# EAGLE board 555srvc-panel (EAGLE 7.2.0), part 1 of 2
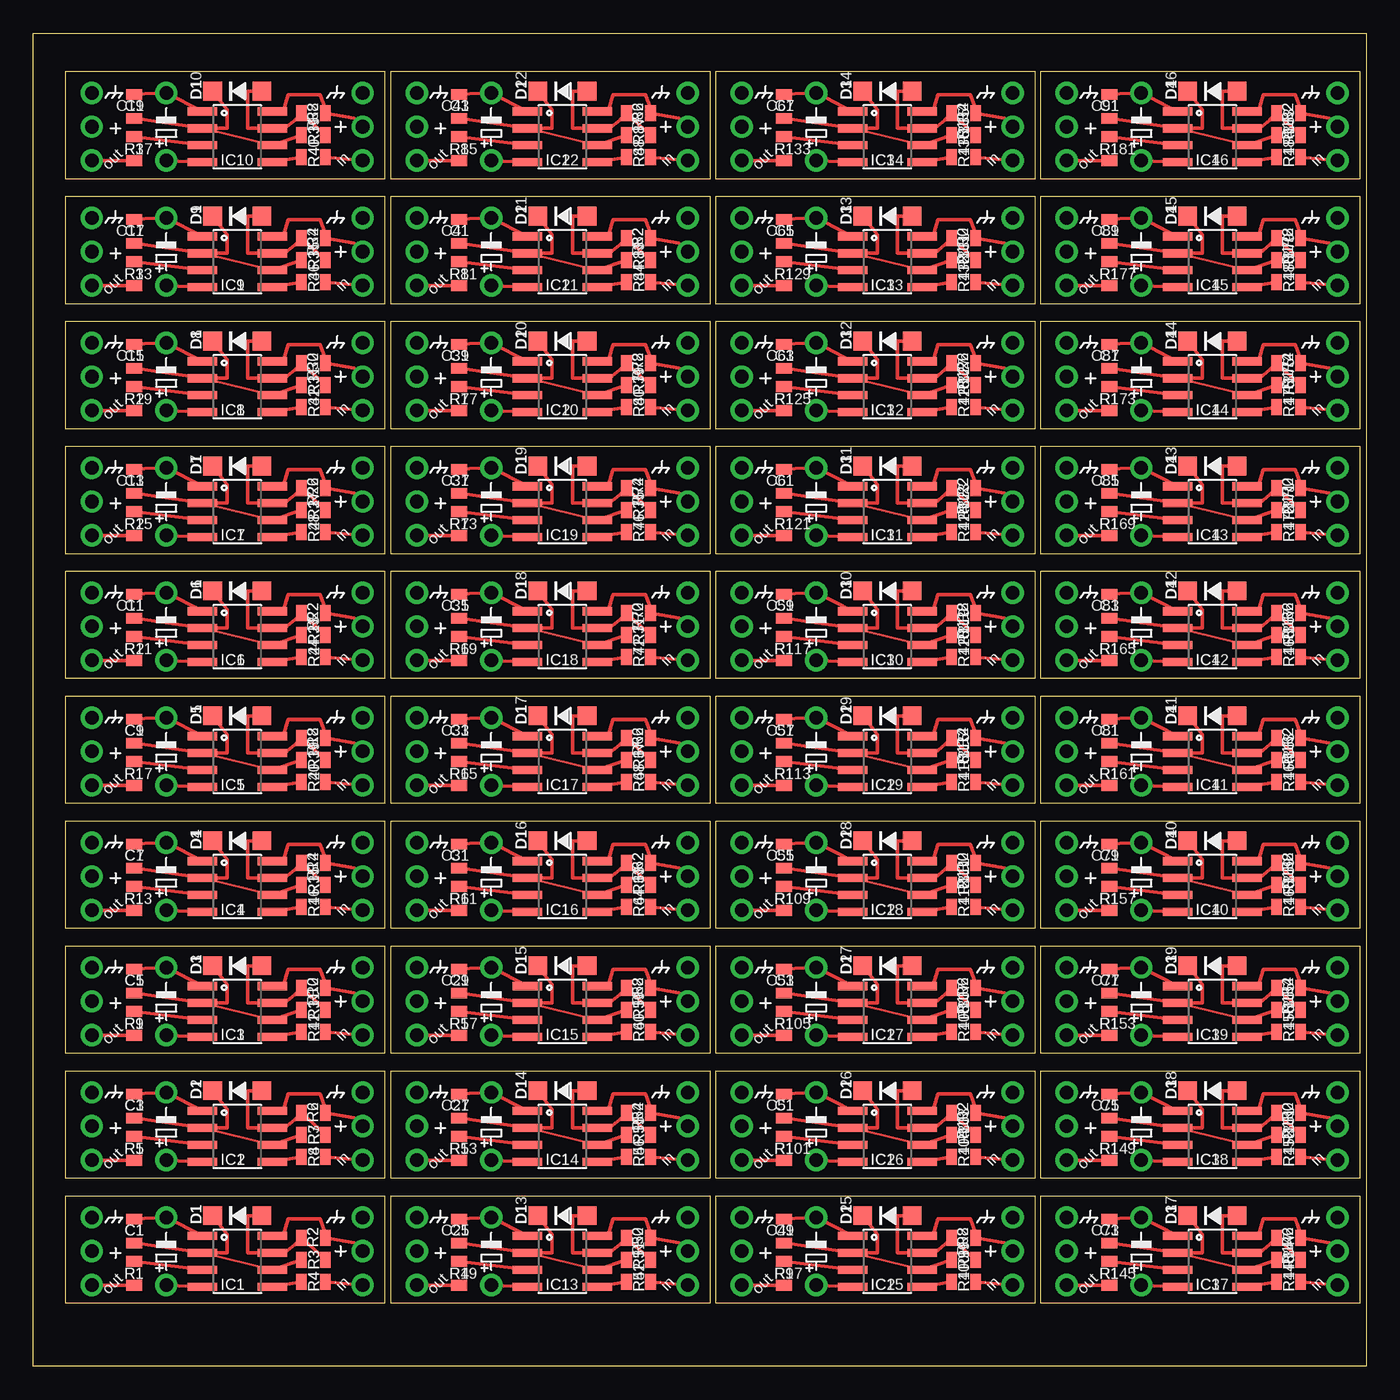
[diagram p0: board, top side]
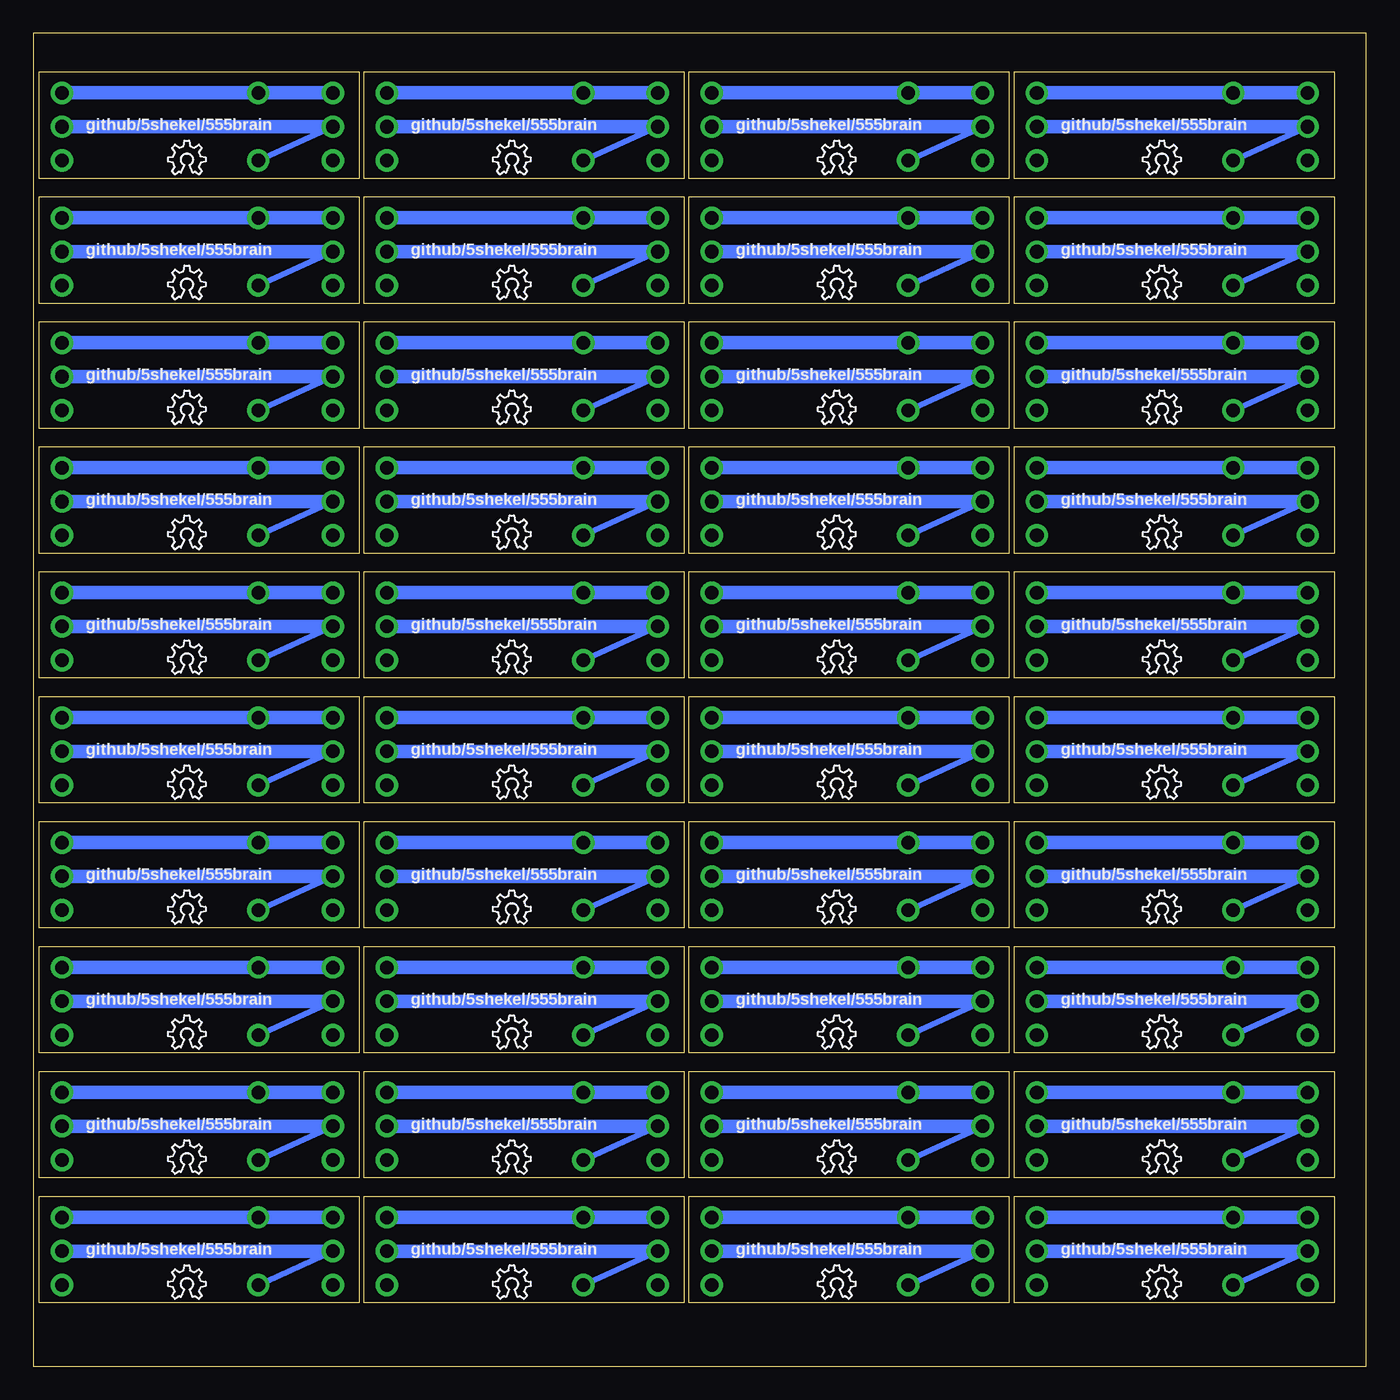
[diagram p1: board, bottom side, seen from below]

Size 100 x 100 mm. Coordinates in mm from the lower left corner, seen from the top.
Outline: 2.41,4.74 26.41,4.74 26.41,12.74 2.41,12.74 2.41,4.74
Outline: 2.41,14.12 26.41,14.12 26.41,22.12 2.41,22.12 2.41,14.12
Outline: 2.41,23.49 26.41,23.49 26.41,31.49 2.41,31.49 2.41,23.49
Outline: 2.41,32.87 26.41,32.87 26.41,40.87 2.41,40.87 2.41,32.87
Outline: 2.41,42.24 26.41,42.24 26.41,50.24 2.41,50.24 2.41,42.24
Outline: 2.41,51.61 26.41,51.61 26.41,59.61 2.41,59.61 2.41,51.61
Outline: 2.41,60.99 26.41,60.99 26.41,68.99 2.41,68.99 2.41,60.99
Outline: 2.41,70.36 26.41,70.36 26.41,78.36 2.41,78.36 2.41,70.36
Outline: 2.41,79.73 26.41,79.73 26.41,87.73 2.41,87.73 2.41,79.73
Outline: 2.41,89.11 26.41,89.11 26.41,97.11 2.41,97.11 2.41,89.11
Outline: 26.79,4.74 50.79,4.74 50.79,12.74 26.79,12.74 26.79,4.74
Outline: 26.79,14.12 50.79,14.12 50.79,22.12 26.79,22.12 26.79,14.12
Outline: 26.79,23.49 50.79,23.49 50.79,31.49 26.79,31.49 26.79,23.49
Outline: 26.79,32.87 50.79,32.87 50.79,40.87 26.79,40.87 26.79,32.87
Outline: 26.79,42.24 50.79,42.24 50.79,50.24 26.79,50.24 26.79,42.24
Outline: 26.79,51.61 50.79,51.61 50.79,59.61 26.79,59.61 26.79,51.61
Outline: 26.79,60.99 50.79,60.99 50.79,68.99 26.79,68.99 26.79,60.99
Outline: 26.79,70.36 50.79,70.36 50.79,78.36 26.79,78.36 26.79,70.36
Outline: 26.79,79.73 50.79,79.73 50.79,87.73 26.79,87.73 26.79,79.73
Outline: 26.79,89.11 50.79,89.11 50.79,97.11 26.79,97.11 26.79,89.11
Outline: 51.18,4.74 75.18,4.74 75.18,12.74 51.18,12.74 51.18,4.74
Outline: 51.18,14.12 75.18,14.12 75.18,22.12 51.18,22.12 51.18,14.12
Outline: 51.18,23.49 75.18,23.49 75.18,31.49 51.18,31.49 51.18,23.49
Outline: 51.18,32.87 75.18,32.87 75.18,40.87 51.18,40.87 51.18,32.87
Outline: 51.18,42.24 75.18,42.24 75.18,50.24 51.18,50.24 51.18,42.24
Outline: 51.18,51.61 75.18,51.61 75.18,59.61 51.18,59.61 51.18,51.61
Outline: 51.18,60.99 75.18,60.99 75.18,68.99 51.18,68.99 51.18,60.99
Outline: 51.18,70.36 75.18,70.36 75.18,78.36 51.18,78.36 51.18,70.36
Outline: 51.18,79.73 75.18,79.73 75.18,87.73 51.18,87.73 51.18,79.73
Outline: 51.18,89.11 75.18,89.11 75.18,97.11 51.18,97.11 51.18,89.11
Outline: 75.56,4.74 99.56,4.74 99.56,12.74 75.56,12.74 75.56,4.74
Outline: 75.56,14.12 99.56,14.12 99.56,22.12 75.56,22.12 75.56,14.12
Outline: 75.56,23.49 99.56,23.49 99.56,31.49 75.56,31.49 75.56,23.49
Outline: 75.56,32.87 99.56,32.87 99.56,40.87 75.56,40.87 75.56,32.87
Outline: 75.56,42.24 99.56,42.24 99.56,50.24 75.56,50.24 75.56,42.24
Outline: 75.56,51.61 99.56,51.61 99.56,59.61 75.56,59.61 75.56,51.61
Outline: 75.56,60.99 99.56,60.99 99.56,68.99 75.56,68.99 75.56,60.99
Outline: 75.56,70.36 99.56,70.36 99.56,78.36 75.56,78.36 75.56,70.36
Outline: 75.56,79.73 99.56,79.73 99.56,87.73 75.56,87.73 75.56,79.73
Outline: 75.56,89.11 99.56,89.11 99.56,97.11 75.56,97.11 75.56,89.11
Outline: 0,0 0,100 100,100 100,0 0,0
Copper layers (1*16): Top 0.035mm / dielectric 1.5mm / Bottom 0.035mm
Design rules "default": minimum track width 10mil, minimum drill 0.6mm, track to track 8mil, track to pad 8mil, pad to pad 8mil, via to via 8mil, smd to smd 8mil, copper to edge 40mil, drill to drill 8mil, minimum pad ring 10mil, minimum via ring 8mil, stop-mask expansion 4mil, vias tented up to drill 0mil, thermal gap 10mil

## Footprints (pad centres in the part's own frame; a part is rotated, then mirrored left to right if it is on the bottom)
0805 = smd 0.8 x 1.2: 1 -0.9,0; 2 0.9,0
E5-6 = drill 1.016 pad 1.677: + -2.54,0 | drill 1.016 pad 1.676: - 2.54,0
SOD-123 = smd 1.4 x 1.4: A 1.85,0; C -1.85,0
SO08 = smd 0.61 x 2.21: 1 -1.905,-2.616; 2 -0.635,-2.616; 3 0.635,-2.616; 4 1.905,-2.616; 5 1.905,2.616; 6 0.635,2.616; 7 -0.635,2.616; 8 -1.905,2.616
1X03-CLEANBIG = drill 1.016 pad 1.676: 1 -2.54,0; 2 0,0; 3 2.54,0

## Placement (x,y rotation side)
C1  1uF  [0805]  7.56,10.15 90 top
C2  [E5-6]  9.97,8.63 90 top
C3  1uF  [0805]  7.56,19.52 90 top
C4  [E5-6]  9.97,18 90 top
C5  1uF  [0805]  7.56,28.9 90 top
C6  [E5-6]  9.97,27.37 90 top
C7  1uF  [0805]  7.56,38.27 90 top
C8  [E5-6]  9.97,36.75 90 top
C9  1uF  [0805]  7.56,47.65 90 top
C10  [E5-6]  9.97,46.12 90 top
C11  1uF  [0805]  7.56,57.02 90 top
C12  [E5-6]  9.97,55.5 90 top
C13  1uF  [0805]  7.56,66.39 90 top
C14  [E5-6]  9.97,64.87 90 top
C15  1uF  [0805]  7.56,75.77 90 top
C16  [E5-6]  9.97,74.24 90 top
C17  1uF  [0805]  7.56,85.14 90 top
C18  [E5-6]  9.97,83.62 90 top
C19  1uF  [0805]  7.56,94.52 90 top
C20  [E5-6]  9.97,92.99 90 top
C25  1uF  [0805]  31.95,10.15 90 top
C26  [E5-6]  34.36,8.63 90 top
C27  1uF  [0805]  31.95,19.52 90 top
C28  [E5-6]  34.36,18 90 top
C29  1uF  [0805]  31.95,28.9 90 top
C30  [E5-6]  34.36,27.37 90 top
C31  1uF  [0805]  31.95,38.27 90 top
C32  [E5-6]  34.36,36.75 90 top
C33  1uF  [0805]  31.95,47.65 90 top
C34  [E5-6]  34.36,46.12 90 top
C35  1uF  [0805]  31.95,57.02 90 top
C36  [E5-6]  34.36,55.5 90 top
C37  1uF  [0805]  31.95,66.39 90 top
C38  [E5-6]  34.36,64.87 90 top
C39  1uF  [0805]  31.95,75.77 90 top
C40  [E5-6]  34.36,74.24 90 top
C41  1uF  [0805]  31.95,85.14 90 top
C42  [E5-6]  34.36,83.62 90 top
C43  1uF  [0805]  31.95,94.52 90 top
C44  [E5-6]  34.36,92.99 90 top
C49  1uF  [0805]  56.33,10.15 90 top
C50  [E5-6]  58.74,8.63 90 top
C51  1uF  [0805]  56.33,19.52 90 top
C52  [E5-6]  58.74,18 90 top
C53  1uF  [0805]  56.33,28.9 90 top
C54  [E5-6]  58.74,27.37 90 top
C55  1uF  [0805]  56.33,38.27 90 top
C56  [E5-6]  58.74,36.75 90 top
C57  1uF  [0805]  56.33,47.65 90 top
C58  [E5-6]  58.74,46.12 90 top
C59  1uF  [0805]  56.33,57.02 90 top
C60  [E5-6]  58.74,55.5 90 top
C61  1uF  [0805]  56.33,66.39 90 top
C62  [E5-6]  58.74,64.87 90 top
C63  1uF  [0805]  56.33,75.77 90 top
C64  [E5-6]  58.74,74.24 90 top
C65  1uF  [0805]  56.33,85.14 90 top
C66  [E5-6]  58.74,83.62 90 top
C67  1uF  [0805]  56.33,94.52 90 top
C68  [E5-6]  58.74,92.99 90 top
C73  1uF  [0805]  80.71,10.15 90 top
C74  [E5-6]  83.13,8.63 90 top
C75  1uF  [0805]  80.71,19.52 90 top
C76  [E5-6]  83.13,18 90 top
C77  1uF  [0805]  80.71,28.9 90 top
C78  [E5-6]  83.13,27.37 90 top
C79  1uF  [0805]  80.71,38.27 90 top
C80  [E5-6]  83.13,36.75 90 top
C81  1uF  [0805]  80.71,47.65 90 top
C82  [E5-6]  83.13,46.12 90 top
C83  1uF  [0805]  80.71,57.02 90 top
C84  [E5-6]  83.13,55.5 90 top
C85  1uF  [0805]  80.71,66.39 90 top
C86  [E5-6]  83.13,64.87 90 top
C87  1uF  [0805]  80.71,75.77 90 top
C88  [E5-6]  83.13,74.24 90 top
C89  1uF  [0805]  80.71,85.14 90 top
C90  [E5-6]  83.13,83.62 90 top
C91  1uF  [0805]  80.71,94.52 90 top
C92  [E5-6]  83.13,92.99 90 top
D1  [SOD-123]  15.31,11.29 0 top
D2  [SOD-123]  15.31,20.67 0 top
D3  [SOD-123]  15.31,30.04 0 top
D4  [SOD-123]  15.31,39.41 0 top
D5  [SOD-123]  15.31,48.79 0 top
D6  [SOD-123]  15.31,58.16 0 top
D7  [SOD-123]  15.31,67.54 0 top
D8  [SOD-123]  15.31,76.91 0 top
D9  [SOD-123]  15.31,86.28 0 top
D10  [SOD-123]  15.31,95.66 0 top
D13  [SOD-123]  39.69,11.29 0 top
D14  [SOD-123]  39.69,20.67 0 top
D15  [SOD-123]  39.69,30.04 0 top
D16  [SOD-123]  39.69,39.41 0 top
D17  [SOD-123]  39.69,48.79 0 top
D18  [SOD-123]  39.69,58.16 0 top
D19  [SOD-123]  39.69,67.54 0 top
D20  [SOD-123]  39.69,76.91 0 top
D21  [SOD-123]  39.69,86.28 0 top
D22  [SOD-123]  39.69,95.66 0 top
D25  [SOD-123]  64.08,11.29 0 top
D26  [SOD-123]  64.08,20.67 0 top
D27  [SOD-123]  64.08,30.04 0 top
D28  [SOD-123]  64.08,39.41 0 top
D29  [SOD-123]  64.08,48.79 0 top
D30  [SOD-123]  64.08,58.16 0 top
D31  [SOD-123]  64.08,67.54 0 top
D32  [SOD-123]  64.08,76.91 0 top
D33  [SOD-123]  64.08,86.28 0 top
D34  [SOD-123]  64.08,95.66 0 top
D37  [SOD-123]  88.46,11.29 0 top
D38  [SOD-123]  88.46,20.67 0 top
D39  [SOD-123]  88.46,30.04 0 top
D40  [SOD-123]  88.46,39.41 0 top
D41  [SOD-123]  88.46,48.79 0 top
D42  [SOD-123]  88.46,58.16 0 top
D43  [SOD-123]  88.46,67.54 0 top
D44  [SOD-123]  88.46,76.91 0 top
D45  [SOD-123]  88.46,86.28 0 top
D46  [SOD-123]  88.46,95.66 0 top
IC1  555  [SO08]  15.31,7.86 270 top
IC2  555  [SO08]  15.31,17.24 270 top
IC3  555  [SO08]  15.31,26.61 270 top
IC4  555  [SO08]  15.31,35.99 270 top
IC5  555  [SO08]  15.31,45.36 270 top
IC6  555  [SO08]  15.31,54.73 270 top
IC7  555  [SO08]  15.31,64.11 270 top
IC8  555  [SO08]  15.31,73.48 270 top
IC9  555  [SO08]  15.31,82.86 270 top
IC10  555  [SO08]  15.31,92.23 270 top
IC13  555  [SO08]  39.69,7.86 270 top
IC14  555  [SO08]  39.69,17.24 270 top
IC15  555  [SO08]  39.69,26.61 270 top
IC16  555  [SO08]  39.69,35.99 270 top
IC17  555  [SO08]  39.69,45.36 270 top
IC18  555  [SO08]  39.69,54.73 270 top
IC19  555  [SO08]  39.69,64.11 270 top
IC20  555  [SO08]  39.69,73.48 270 top
IC21  555  [SO08]  39.69,82.86 270 top
IC22  555  [SO08]  39.69,92.23 270 top
IC25  555  [SO08]  64.08,7.86 270 top
IC26  555  [SO08]  64.08,17.24 270 top
IC27  555  [SO08]  64.08,26.61 270 top
IC28  555  [SO08]  64.08,35.99 270 top
IC29  555  [SO08]  64.08,45.36 270 top
IC30  555  [SO08]  64.08,54.73 270 top
IC31  555  [SO08]  64.08,64.11 270 top
IC32  555  [SO08]  64.08,73.48 270 top
IC33  555  [SO08]  64.08,82.86 270 top
IC34  555  [SO08]  64.08,92.23 270 top
IC37  555  [SO08]  88.46,7.86 270 top
IC38  555  [SO08]  88.46,17.24 270 top
IC39  555  [SO08]  88.46,26.61 270 top
IC40  555  [SO08]  88.46,35.99 270 top
IC41  555  [SO08]  88.46,45.36 270 top
IC42  555  [SO08]  88.46,54.73 270 top
IC43  555  [SO08]  88.46,64.11 270 top
IC44  555  [SO08]  88.46,73.48 270 top
IC45  555  [SO08]  88.46,82.86 270 top
IC46  555  [SO08]  88.46,92.23 270 top
JP1  SERVO_OUT  [1X03-CLEANBIG]  4.39,18 270 top
JP2  SERVO_OUT  [1X03-CLEANBIG]  4.39,8.63 270 top
JP3  INPUT / CV  [1X03-CLEANBIG]  24.71,8.63 270 top
JP4  INPUT / CV  [1X03-CLEANBIG]  24.71,18 270 top
JP5  SERVO_OUT  [1X03-CLEANBIG]  4.39,27.37 270 top
JP6  INPUT / CV  [1X03-CLEANBIG]  24.71,27.37 270 top
JP7  SERVO_OUT  [1X03-CLEANBIG]  4.39,36.75 270 top
JP8  INPUT / CV  [1X03-CLEANBIG]  24.71,36.75 270 top
JP9  SERVO_OUT  [1X03-CLEANBIG]  4.39,46.12 270 top
JP10  INPUT / CV  [1X03-CLEANBIG]  24.71,46.12 270 top
JP11  SERVO_OUT  [1X03-CLEANBIG]  4.39,55.5 270 top
JP12  INPUT / CV  [1X03-CLEANBIG]  24.71,55.5 270 top
JP13  SERVO_OUT  [1X03-CLEANBIG]  4.39,64.87 270 top
JP14  INPUT / CV  [1X03-CLEANBIG]  24.71,64.87 270 top
JP15  SERVO_OUT  [1X03-CLEANBIG]  4.39,74.24 270 top
JP16  INPUT / CV  [1X03-CLEANBIG]  24.71,74.24 270 top
JP17  SERVO_OUT  [1X03-CLEANBIG]  4.39,83.62 270 top
JP18  INPUT / CV  [1X03-CLEANBIG]  24.71,83.62 270 top
JP19  SERVO_OUT  [1X03-CLEANBIG]  4.39,92.99 270 top
JP20  INPUT / CV  [1X03-CLEANBIG]  24.71,92.99 270 top
JP25  SERVO_OUT  [1X03-CLEANBIG]  28.77,8.63 270 top
JP26  INPUT / CV  [1X03-CLEANBIG]  49.09,8.63 270 top
JP27  SERVO_OUT  [1X03-CLEANBIG]  28.77,18 270 top
JP28  INPUT / CV  [1X03-CLEANBIG]  49.09,18 270 top
JP29  SERVO_OUT  [1X03-CLEANBIG]  28.77,27.37 270 top
JP30  INPUT / CV  [1X03-CLEANBIG]  49.09,27.37 270 top
JP31  SERVO_OUT  [1X03-CLEANBIG]  28.77,36.75 270 top
JP32  INPUT / CV  [1X03-CLEANBIG]  49.09,36.75 270 top
JP33  SERVO_OUT  [1X03-CLEANBIG]  28.77,46.12 270 top
JP34  INPUT / CV  [1X03-CLEANBIG]  49.09,46.12 270 top
JP35  SERVO_OUT  [1X03-CLEANBIG]  28.77,55.5 270 top
JP36  INPUT / CV  [1X03-CLEANBIG]  49.09,55.5 270 top
JP37  SERVO_OUT  [1X03-CLEANBIG]  28.77,64.87 270 top
JP38  INPUT / CV  [1X03-CLEANBIG]  49.09,64.87 270 top
JP39  SERVO_OUT  [1X03-CLEANBIG]  28.77,74.24 270 top
JP40  INPUT / CV  [1X03-CLEANBIG]  49.09,74.24 270 top
JP41  SERVO_OUT  [1X03-CLEANBIG]  28.77,83.62 270 top
JP42  INPUT / CV  [1X03-CLEANBIG]  49.09,83.62 270 top
JP43  SERVO_OUT  [1X03-CLEANBIG]  28.77,92.99 270 top
JP44  INPUT / CV  [1X03-CLEANBIG]  49.09,92.99 270 top
JP49  SERVO_OUT  [1X03-CLEANBIG]  53.15,8.63 270 top
JP50  INPUT / CV  [1X03-CLEANBIG]  73.47,8.63 270 top
JP51  SERVO_OUT  [1X03-CLEANBIG]  53.15,18 270 top
JP52  INPUT / CV  [1X03-CLEANBIG]  73.47,18 270 top
JP53  SERVO_OUT  [1X03-CLEANBIG]  53.15,27.37 270 top
JP54  INPUT / CV  [1X03-CLEANBIG]  73.47,27.37 270 top
JP55  SERVO_OUT  [1X03-CLEANBIG]  53.15,36.75 270 top
JP56  INPUT / CV  [1X03-CLEANBIG]  73.47,36.75 270 top
JP57  SERVO_OUT  [1X03-CLEANBIG]  53.15,46.12 270 top
JP58  INPUT / CV  [1X03-CLEANBIG]  73.47,46.12 270 top
JP59  SERVO_OUT  [1X03-CLEANBIG]  53.15,55.5 270 top
JP60  INPUT / CV  [1X03-CLEANBIG]  73.47,55.5 270 top
JP61  SERVO_OUT  [1X03-CLEANBIG]  53.15,64.87 270 top
JP62  INPUT / CV  [1X03-CLEANBIG]  73.47,64.87 270 top
JP63  SERVO_OUT  [1X03-CLEANBIG]  53.15,74.24 270 top
JP64  INPUT / CV  [1X03-CLEANBIG]  73.47,74.24 270 top
JP65  SERVO_OUT  [1X03-CLEANBIG]  53.15,83.62 270 top
JP66  INPUT / CV  [1X03-CLEANBIG]  73.47,83.62 270 top
JP67  SERVO_OUT  [1X03-CLEANBIG]  53.15,92.99 270 top
JP68  INPUT / CV  [1X03-CLEANBIG]  73.47,92.99 270 top
JP73  SERVO_OUT  [1X03-CLEANBIG]  77.54,8.63 270 top
JP74  INPUT / CV  [1X03-CLEANBIG]  97.86,8.63 270 top
JP75  SERVO_OUT  [1X03-CLEANBIG]  77.54,18 270 top
JP76  INPUT / CV  [1X03-CLEANBIG]  97.86,18 270 top
JP77  SERVO_OUT  [1X03-CLEANBIG]  77.54,27.37 270 top
JP78  INPUT / CV  [1X03-CLEANBIG]  97.86,27.37 270 top
JP79  SERVO_OUT  [1X03-CLEANBIG]  77.54,36.75 270 top
JP80  INPUT / CV  [1X03-CLEANBIG]  97.86,36.75 270 top
JP81  SERVO_OUT  [1X03-CLEANBIG]  77.54,46.12 270 top
JP82  INPUT / CV  [1X03-CLEANBIG]  97.86,46.12 270 top
JP83  SERVO_OUT  [1X03-CLEANBIG]  77.54,55.5 270 top
JP84  INPUT / CV  [1X03-CLEANBIG]  97.86,55.5 270 top
JP85  SERVO_OUT  [1X03-CLEANBIG]  77.54,64.87 270 top
JP86  INPUT / CV  [1X03-CLEANBIG]  97.86,64.87 270 top
JP87  SERVO_OUT  [1X03-CLEANBIG]  77.54,74.24 270 top
JP88  INPUT / CV  [1X03-CLEANBIG]  97.86,74.24 270 top
JP89  SERVO_OUT  [1X03-CLEANBIG]  77.54,83.62 270 top
JP90  INPUT / CV  [1X03-CLEANBIG]  97.86,83.62 270 top
JP91  SERVO_OUT  [1X03-CLEANBIG]  77.54,92.99 270 top
JP92  INPUT / CV  [1X03-CLEANBIG]  97.86,92.99 270 top
R1  2.2k  [0805]  7.56,6.97 270 top
R2  1.5k  [0805]  21.02,9.64 180 top
R3  47k  [0805]  21.02,7.99 0 top
R4  15k  [0805]  21.02,6.34 0 top
R5  2.2k  [0805]  7.56,16.35 270 top
R6  1.5k  [0805]  21.02,19.02 180 top
R7  47k  [0805]  21.02,17.36 0 top
R8  15k  [0805]  21.02,15.71 0 top
R9  2.2k  [0805]  7.56,25.72 270 top
R10  1.5k  [0805]  21.02,28.39 180 top
R11  47k  [0805]  21.02,26.74 0 top
R12  15k  [0805]  21.02,25.09 0 top
R13  2.2k  [0805]  7.56,35.1 270 top
R14  1.5k  [0805]  21.02,37.76 180 top
R15  47k  [0805]  21.02,36.11 0 top
R16  15k  [0805]  21.02,34.46 0 top
R17  2.2k  [0805]  7.56,44.47 270 top
R18  1.5k  [0805]  21.02,47.14 180 top
R19  47k  [0805]  21.02,45.49 0 top
R20  15k  [0805]  21.02,43.84 0 top
R21  2.2k  [0805]  7.56,53.84 270 top
R22  1.5k  [0805]  21.02,56.51 180 top
R23  47k  [0805]  21.02,54.86 0 top
R24  15k  [0805]  21.02,53.21 0 top
R25  2.2k  [0805]  7.56,63.22 270 top
R26  1.5k  [0805]  21.02,65.89 180 top
R27  47k  [0805]  21.02,64.23 0 top
R28  15k  [0805]  21.02,62.58 0 top
R29  2.2k  [0805]  7.56,72.59 270 top
R30  1.5k  [0805]  21.02,75.26 180 top
R31  47k  [0805]  21.02,73.61 0 top
R32  15k  [0805]  21.02,71.96 0 top
R33  2.2k  [0805]  7.56,81.97 270 top
R34  1.5k  [0805]  21.02,84.63 180 top
R35  47k  [0805]  21.02,82.98 0 top
R36  15k  [0805]  21.02,81.33 0 top
R37  2.2k  [0805]  7.56,91.34 270 top
R38  1.5k  [0805]  21.02,94.01 180 top
R39  47k  [0805]  21.02,92.36 0 top
R40  15k  [0805]  21.02,90.71 0 top
R49  2.2k  [0805]  31.95,6.97 270 top
R50  1.5k  [0805]  45.41,9.64 180 top
R51  47k  [0805]  45.41,7.99 0 top
R52  15k  [0805]  45.41,6.34 0 top
R53  2.2k  [0805]  31.95,16.35 270 top
R54  1.5k  [0805]  45.41,19.02 180 top
R55  47k  [0805]  45.41,17.36 0 top
R56  15k  [0805]  45.41,15.71 0 top
R57  2.2k  [0805]  31.95,25.72 270 top
R58  1.5k  [0805]  45.41,28.39 180 top
R59  47k  [0805]  45.41,26.74 0 top
R60  15k  [0805]  45.41,25.09 0 top
R61  2.2k  [0805]  31.95,35.1 270 top
R62  1.5k  [0805]  45.41,37.76 180 top
R63  47k  [0805]  45.41,36.11 0 top
R64  15k  [0805]  45.41,34.46 0 top
R65  2.2k  [0805]  31.95,44.47 270 top
R66  1.5k  [0805]  45.41,47.14 180 top
R67  47k  [0805]  45.41,45.49 0 top
R68  15k  [0805]  45.41,43.84 0 top
R69  2.2k  [0805]  31.95,53.84 270 top
R70  1.5k  [0805]  45.41,56.51 180 top
R71  47k  [0805]  45.41,54.86 0 top
R72  15k  [0805]  45.41,53.21 0 top
R73  2.2k  [0805]  31.95,63.22 270 top
R74  1.5k  [0805]  45.41,65.89 180 top
R75  47k  [0805]  45.41,64.23 0 top
R76  15k  [0805]  45.41,62.58 0 top
R77  2.2k  [0805]  31.95,72.59 270 top
R78  1.5k  [0805]  45.41,75.26 180 top
R79  47k  [0805]  45.41,73.61 0 top
R80  15k  [0805]  45.41,71.96 0 top
R81  2.2k  [0805]  31.95,81.97 270 top
R82  1.5k  [0805]  45.41,84.63 180 top
R83  47k  [0805]  45.41,82.98 0 top
R84  15k  [0805]  45.41,81.33 0 top
R85  2.2k  [0805]  31.95,91.34 270 top
R86  1.5k  [0805]  45.41,94.01 180 top
R87  47k  [0805]  45.41,92.36 0 top
R88  15k  [0805]  45.41,90.71 0 top
R97  2.2k  [0805]  56.33,6.97 270 top
R98  1.5k  [0805]  69.79,9.64 180 top
R99  47k  [0805]  69.79,7.99 0 top
R100  15k  [0805]  69.79,6.34 0 top
R101  2.2k  [0805]  56.33,16.35 270 top
R102  1.5k  [0805]  69.79,19.02 180 top
R103  47k  [0805]  69.79,17.36 0 top
R104  15k  [0805]  69.79,15.71 0 top
R105  2.2k  [0805]  56.33,25.72 270 top
R106  1.5k  [0805]  69.79,28.39 180 top
R107  47k  [0805]  69.79,26.74 0 top
R108  15k  [0805]  69.79,25.09 0 top
R109  2.2k  [0805]  56.33,35.1 270 top
R110  1.5k  [0805]  69.79,37.76 180 top
R111  47k  [0805]  69.79,36.11 0 top
R112  15k  [0805]  69.79,34.46 0 top
R113  2.2k  [0805]  56.33,44.47 270 top
R114  1.5k  [0805]  69.79,47.14 180 top
R115  47k  [0805]  69.79,45.49 0 top
R116  15k  [0805]  69.79,43.84 0 top
R117  2.2k  [0805]  56.33,53.84 270 top
R118  1.5k  [0805]  69.79,56.51 180 top
R119  47k  [0805]  69.79,54.86 0 top
R120  15k  [0805]  69.79,53.21 0 top
R121  2.2k  [0805]  56.33,63.22 270 top
R122  1.5k  [0805]  69.79,65.89 180 top
R123  47k  [0805]  69.79,64.23 0 top
R124  15k  [0805]  69.79,62.58 0 top
R125  2.2k  [0805]  56.33,72.59 270 top
R126  1.5k  [0805]  69.79,75.26 180 top
R127  47k  [0805]  69.79,73.61 0 top
R128  15k  [0805]  69.79,71.96 0 top
R129  2.2k  [0805]  56.33,81.97 270 top
R130  1.5k  [0805]  69.79,84.63 180 top
R131  47k  [0805]  69.79,82.98 0 top
R132  15k  [0805]  69.79,81.33 0 top
R133  2.2k  [0805]  56.33,91.34 270 top
R134  1.5k  [0805]  69.79,94.01 180 top
R135  47k  [0805]  69.79,92.36 0 top
R136  15k  [0805]  69.79,90.71 0 top
R145  2.2k  [0805]  80.71,6.97 270 top
R146  1.5k  [0805]  94.17,9.64 180 top
R147  47k  [0805]  94.17,7.99 0 top
R148  15k  [0805]  94.17,6.34 0 top
R149  2.2k  [0805]  80.71,16.35 270 top
R150  1.5k  [0805]  94.17,19.02 180 top
R151  47k  [0805]  94.17,17.36 0 top
R152  15k  [0805]  94.17,15.71 0 top
R153  2.2k  [0805]  80.71,25.72 270 top
R154  1.5k  [0805]  94.17,28.39 180 top
R155  47k  [0805]  94.17,26.74 0 top
R156  15k  [0805]  94.17,25.09 0 top
R157  2.2k  [0805]  80.71,35.1 270 top
R158  1.5k  [0805]  94.17,37.76 180 top
R159  47k  [0805]  94.17,36.11 0 top
R160  15k  [0805]  94.17,34.46 0 top
R161  2.2k  [0805]  80.71,44.47 270 top
R162  1.5k  [0805]  94.17,47.14 180 top
R163  47k  [0805]  94.17,45.49 0 top
R164  15k  [0805]  94.17,43.84 0 top
R165  2.2k  [0805]  80.71,53.84 270 top
R166  1.5k  [0805]  94.17,56.51 180 top
R167  47k  [0805]  94.17,54.86 0 top
R168  15k  [0805]  94.17,53.21 0 top
R169  2.2k  [0805]  80.71,63.22 270 top
R170  1.5k  [0805]  94.17,65.89 180 top
R171  47k  [0805]  94.17,64.23 0 top
R172  15k  [0805]  94.17,62.58 0 top
R173  2.2k  [0805]  80.71,72.59 270 top
R174  1.5k  [0805]  94.17,75.26 180 top
R175  47k  [0805]  94.17,73.61 0 top
R176  15k  [0805]  94.17,71.96 0 top
R177  2.2k  [0805]  80.71,81.97 270 top
R178  1.5k  [0805]  94.17,84.63 180 top
R179  47k  [0805]  94.17,82.98 0 top
R180  15k  [0805]  94.17,81.33 0 top
R181  2.2k  [0805]  80.71,91.34 270 top
R182  1.5k  [0805]  94.17,94.01 180 top
R183  47k  [0805]  94.17,92.36 0 top
R184  15k  [0805]  94.17,90.71 0 top
U$1  [OSHW_6X100_NOTEXT]  16.74,14.42 0 bottom
U$2  [OSHW_6X100_NOTEXT]  16.74,23.79 0 bottom
U$3  [OSHW_6X100_NOTEXT]  16.74,33.16 0 bottom
U$4  [OSHW_6X100_NOTEXT]  16.74,42.54 0 bottom
U$5  [OSHW_6X100_NOTEXT]  16.74,5.04 0 bottom
U$6  [OSHW_6X100_NOTEXT]  16.74,51.91 0 bottom
U$7  [OSHW_6X100_NOTEXT]  16.74,61.29 0 bottom
U$8  [OSHW_6X100_NOTEXT]  16.74,70.66 0 bottom
U$9  [OSHW_6X100_NOTEXT]  16.74,80.03 0 bottom
U$10  [OSHW_6X100_NOTEXT]  16.74,89.41 0 bottom
U$13  [OSHW_6X100_NOTEXT]  41.13,5.04 0 bottom
U$14  [OSHW_6X100_NOTEXT]  41.13,14.42 0 bottom
U$15  [OSHW_6X100_NOTEXT]  41.13,23.79 0 bottom
U$16  [OSHW_6X100_NOTEXT]  41.13,33.16 0 bottom
U$17  [OSHW_6X100_NOTEXT]  41.13,42.54 0 bottom
U$18  [OSHW_6X100_NOTEXT]  41.13,51.91 0 bottom
U$19  [OSHW_6X100_NOTEXT]  41.13,61.29 0 bottom
U$20  [OSHW_6X100_NOTEXT]  41.13,70.66 0 bottom
U$21  [OSHW_6X100_NOTEXT]  41.13,80.03 0 bottom
U$22  [OSHW_6X100_NOTEXT]  41.13,89.41 0 bottom
U$25  [OSHW_6X100_NOTEXT]  65.51,5.04 0 bottom
U$26  [OSHW_6X100_NOTEXT]  65.51,14.42 0 bottom
U$27  [OSHW_6X100_NOTEXT]  65.51,23.79 0 bottom
U$28  [OSHW_6X100_NOTEXT]  65.51,33.16 0 bottom
U$29  [OSHW_6X100_NOTEXT]  65.51,42.54 0 bottom
U$30  [OSHW_6X100_NOTEXT]  65.51,51.91 0 bottom
U$31  [OSHW_6X100_NOTEXT]  65.51,61.29 0 bottom
U$32  [OSHW_6X100_NOTEXT]  65.51,70.66 0 bottom
U$33  [OSHW_6X100_NOTEXT]  65.51,80.03 0 bottom
U$34  [OSHW_6X100_NOTEXT]  65.51,89.41 0 bottom
U$37  [OSHW_6X100_NOTEXT]  89.89,5.04 0 bottom
U$38  [OSHW_6X100_NOTEXT]  89.89,14.42 0 bottom
U$39  [OSHW_6X100_NOTEXT]  89.89,23.79 0 bottom
U$40  [OSHW_6X100_NOTEXT]  89.89,33.16 0 bottom
U$41  [OSHW_6X100_NOTEXT]  89.89,42.54 0 bottom
U$42  [OSHW_6X100_NOTEXT]  89.89,51.91 0 bottom
U$43  [OSHW_6X100_NOTEXT]  89.89,61.29 0 bottom
U$44  [OSHW_6X100_NOTEXT]  89.89,70.66 0 bottom
U$45  [OSHW_6X100_NOTEXT]  89.89,80.03 0 bottom
U$46  [OSHW_6X100_NOTEXT]  89.89,89.41 0 bottom

## Library data of the parts
C1-C20 C25-C44 C49-C68 C73-C92 D1-D10 D13-D22 D25-D34 D37-D46 IC1-IC10 IC13-IC22 IC25-IC34 IC37-IC46 JP1-JP20 JP25-JP44 JP49-JP68 JP73-JP92 R1-R40 R49-R88 R97-R136 R145-R184 = 555srvc
U$1-U$10 U$13-U$22 U$25-U$34 U$37-U$46 = ohw-logo

## Nets
GND: C1.2 C2.- IC1.1 JP2.1 JP3.1
GND1: C3.2 C4.- IC2.1 JP1.1 JP4.1
GND2: C5.2 C6.- IC3.1 JP5.1 JP6.1
GND3: C7.2 C8.- IC4.1 JP7.1 JP8.1
GND4: C9.2 C10.- IC5.1 JP9.1 JP10.1
GND5: C11.2 C12.- IC6.1 JP11.1 JP12.1
GND6: C13.2 C14.- IC7.1 JP13.1 JP14.1
GND7: C15.2 C16.- IC8.1 JP15.1 JP16.1
GND8: C17.2 C18.- IC9.1 JP17.1 JP18.1
GND9: C19.2 C20.- IC10.1 JP19.1 JP20.1
GND12: C25.2 C26.- IC13.1 JP25.1 JP26.1
GND13: C27.2 C28.- IC14.1 JP27.1 JP28.1
GND14: C29.2 C30.- IC15.1 JP29.1 JP30.1
GND15: C31.2 C32.- IC16.1 JP31.1 JP32.1
GND16: C33.2 C34.- IC17.1 JP33.1 JP34.1
GND17: C35.2 C36.- IC18.1 JP35.1 JP36.1
GND18: C37.2 C38.- IC19.1 JP37.1 JP38.1
GND19: C39.2 C40.- IC20.1 JP39.1 JP40.1
GND20: C41.2 C42.- IC21.1 JP41.1 JP42.1
GND21: C43.2 C44.- IC22.1 JP43.1 JP44.1
GND24: C49.2 C50.- IC25.1 JP49.1 JP50.1
GND25: C51.2 C52.- IC26.1 JP51.1 JP52.1
GND26: C53.2 C54.- IC27.1 JP53.1 JP54.1
GND27: C55.2 C56.- IC28.1 JP55.1 JP56.1
GND28: C57.2 C58.- IC29.1 JP57.1 JP58.1
GND29: C59.2 C60.- IC30.1 JP59.1 JP60.1
GND30: C61.2 C62.- IC31.1 JP61.1 JP62.1
GND31: C63.2 C64.- IC32.1 JP63.1 JP64.1
GND32: C65.2 C66.- IC33.1 JP65.1 JP66.1
GND33: C67.2 C68.- IC34.1 JP67.1 JP68.1
GND36: C73.2 C74.- IC37.1 JP73.1 JP74.1
GND37: C75.2 C76.- IC38.1 JP75.1 JP76.1
GND38: C77.2 C78.- IC39.1 JP77.1 JP78.1
GND39: C79.2 C80.- IC40.1 JP79.1 JP80.1
GND40: C81.2 C82.- IC41.1 JP81.1 JP82.1
GND41: C83.2 C84.- IC42.1 JP83.1 JP84.1
GND42: C85.2 C86.- IC43.1 JP85.1 JP86.1
GND43: C87.2 C88.- IC44.1 JP87.1 JP88.1
GND44: C89.2 C90.- IC45.1 JP89.1 JP90.1
GND45: C91.2 C92.- IC46.1 JP91.1 JP92.1
INPUT: JP3.3 R4.2
INPUT1: JP4.3 R8.2
INPUT2: JP6.3 R12.2
INPUT3: JP8.3 R16.2
INPUT4: JP10.3 R20.2
INPUT5: JP12.3 R24.2
INPUT6: JP14.3 R28.2
INPUT7: JP16.3 R32.2
INPUT8: JP18.3 R36.2
INPUT9: JP20.3 R40.2
INPUT12: JP26.3 R52.2
INPUT13: JP28.3 R56.2
INPUT14: JP30.3 R60.2
INPUT15: JP32.3 R64.2
INPUT16: JP34.3 R68.2
INPUT17: JP36.3 R72.2
INPUT18: JP38.3 R76.2
INPUT19: JP40.3 R80.2
INPUT20: JP42.3 R84.2
INPUT21: JP44.3 R88.2
INPUT24: JP50.3 R100.2
INPUT25: JP52.3 R104.2
INPUT26: JP54.3 R108.2
INPUT27: JP56.3 R112.2
INPUT28: JP58.3 R116.2
INPUT29: JP60.3 R120.2
INPUT30: JP62.3 R124.2
INPUT31: JP64.3 R128.2
INPUT32: JP66.3 R132.2
INPUT33: JP68.3 R136.2
INPUT36: JP74.3 R148.2
INPUT37: JP76.3 R152.2
INPUT38: JP78.3 R156.2
INPUT39: JP80.3 R160.2
INPUT40: JP82.3 R164.2
INPUT41: JP84.3 R168.2
INPUT42: JP86.3 R172.2
INPUT43: JP88.3 R176.2
INPUT44: JP90.3 R180.2
INPUT45: JP92.3 R184.2
N$1: C1.1 D1.C IC1.2 IC1.6 R3.1
N$2: D1.A IC1.7 R2.2 R3.2
N$3: C3.1 D2.C IC2.2 IC2.6 R7.1
N$4: IC1.5 R4.1
N$5: IC1.3 R1.1
N$6: D2.A IC2.7 R6.2 R7.2
N$7: IC2.5 R8.1
N$8: IC2.3 R5.1
N$9: C5.1 D3.C IC3.2 IC3.6 R11.1
N$10: D3.A IC3.7 R10.2 R11.2
N$11: IC3.5 R12.1
N$12: IC3.3 R9.1
N$13: C7.1 D4.C IC4.2 IC4.6 R15.1
N$14: D4.A IC4.7 R14.2 R15.2
N$15: IC4.5 R16.1
N$16: IC4.3 R13.1
N$17: C9.1 D5.C IC5.2 IC5.6 R19.1
N$18: D5.A IC5.7 R18.2 R19.2
N$19: IC5.5 R20.1
N$20: IC5.3 R17.1
N$21: C11.1 D6.C IC6.2 IC6.6 R23.1
N$22: D6.A IC6.7 R22.2 R23.2
N$23: IC6.5 R24.1
N$24: IC6.3 R21.1
N$25: C13.1 D7.C IC7.2 IC7.6 R27.1
N$26: D7.A IC7.7 R26.2 R27.2
N$27: IC7.5 R28.1
N$28: IC7.3 R25.1
N$29: C15.1 D8.C IC8.2 IC8.6 R31.1
N$30: D8.A IC8.7 R30.2 R31.2
N$31: IC8.5 R32.1
N$32: IC8.3 R29.1
N$33: C17.1 D9.C IC9.2 IC9.6 R35.1
N$34: D9.A IC9.7 R34.2 R35.2
N$35: IC9.5 R36.1
N$36: IC9.3 R33.1
N$37: C19.1 D10.C IC10.2 IC10.6 R39.1
N$38: D10.A IC10.7 R38.2 R39.2
N$39: IC10.5 R40.1
N$40: IC10.3 R37.1
N$49: C25.1 D13.C IC13.2 IC13.6 R51.1
N$50: D13.A IC13.7 R50.2 R51.2
N$51: IC13.5 R52.1
N$52: IC13.3 R49.1
N$53: C27.1 D14.C IC14.2 IC14.6 R55.1
N$54: D14.A IC14.7 R54.2 R55.2
N$55: IC14.5 R56.1
N$56: IC14.3 R53.1
N$57: C29.1 D15.C IC15.2 IC15.6 R59.1
N$58: D15.A IC15.7 R58.2 R59.2
N$59: IC15.5 R60.1
N$60: IC15.3 R57.1
N$61: C31.1 D16.C IC16.2 IC16.6 R63.1
N$62: D16.A IC16.7 R62.2 R63.2
N$63: IC16.5 R64.1
N$64: IC16.3 R61.1
N$65: C33.1 D17.C IC17.2 IC17.6 R67.1
N$66: D17.A IC17.7 R66.2 R67.2
N$67: IC17.5 R68.1
N$68: IC17.3 R65.1
N$69: C35.1 D18.C IC18.2 IC18.6 R71.1
N$70: D18.A IC18.7 R70.2 R71.2
N$71: IC18.5 R72.1
N$72: IC18.3 R69.1
N$73: C37.1 D19.C IC19.2 IC19.6 R75.1
N$74: D19.A IC19.7 R74.2 R75.2
N$75: IC19.5 R76.1
N$76: IC19.3 R73.1
N$77: C39.1 D20.C IC20.2 IC20.6 R79.1
N$78: D20.A IC20.7 R78.2 R79.2
N$79: IC20.5 R80.1
N$80: IC20.3 R77.1
N$81: C41.1 D21.C IC21.2 IC21.6 R83.1
N$82: D21.A IC21.7 R82.2 R83.2
N$83: IC21.5 R84.1
N$84: IC21.3 R81.1
N$85: C43.1 D22.C IC22.2 IC22.6 R87.1
N$86: D22.A IC22.7 R86.2 R87.2
N$87: IC22.5 R88.1
N$88: IC22.3 R85.1
N$97: C49.1 D25.C IC25.2 IC25.6 R99.1
N$98: D25.A IC25.7 R98.2 R99.2
N$99: IC25.5 R100.1
N$100: IC25.3 R97.1
N$101: C51.1 D26.C IC26.2 IC26.6 R103.1
N$102: D26.A IC26.7 R102.2 R103.2
N$103: IC26.5 R104.1
N$104: IC26.3 R101.1
N$105: C53.1 D27.C IC27.2 IC27.6 R107.1
N$106: D27.A IC27.7 R106.2 R107.2
N$107: IC27.5 R108.1
N$108: IC27.3 R105.1
N$109: C55.1 D28.C IC28.2 IC28.6 R111.1
N$110: D28.A IC28.7 R110.2 R111.2
N$111: IC28.5 R112.1
N$112: IC28.3 R109.1
N$113: C57.1 D29.C IC29.2 IC29.6 R115.1
N$114: D29.A IC29.7 R114.2 R115.2
N$115: IC29.5 R116.1
N$116: IC29.3 R113.1
N$117: C59.1 D30.C IC30.2 IC30.6 R119.1
N$118: D30.A IC30.7 R118.2 R119.2
N$119: IC30.5 R120.1
N$120: IC30.3 R117.1
N$121: C61.1 D31.C IC31.2 IC31.6 R123.1
N$122: D31.A IC31.7 R122.2 R123.2
N$123: IC31.5 R124.1
N$124: IC31.3 R121.1
N$125: C63.1 D32.C IC32.2 IC32.6 R127.1
N$126: D32.A IC32.7 R126.2 R127.2
N$127: IC32.5 R128.1
N$128: IC32.3 R125.1
N$129: C65.1 D33.C IC33.2 IC33.6 R131.1
N$130: D33.A IC33.7 R130.2 R131.2
N$131: IC33.5 R132.1
N$132: IC33.3 R129.1
N$133: C67.1 D34.C IC34.2 IC34.6 R135.1
N$134: D34.A IC34.7 R134.2 R135.2
N$135: IC34.5 R136.1
N$136: IC34.3 R133.1
N$145: C73.1 D37.C IC37.2 IC37.6 R147.1
N$146: D37.A IC37.7 R146.2 R147.2
N$147: IC37.5 R148.1
N$148: IC37.3 R145.1
N$149: C75.1 D38.C IC38.2 IC38.6 R151.1
N$150: D38.A IC38.7 R150.2 R151.2
N$151: IC38.5 R152.1
N$152: IC38.3 R149.1
N$153: C77.1 D39.C IC39.2 IC39.6 R155.1
N$154: D39.A IC39.7 R154.2 R155.2
N$155: IC39.5 R156.1
N$156: IC39.3 R153.1
N$157: C79.1 D40.C IC40.2 IC40.6 R159.1
N$158: D40.A IC40.7 R158.2 R159.2
N$159: IC40.5 R160.1
N$160: IC40.3 R157.1
N$161: C81.1 D41.C IC41.2 IC41.6 R163.1
N$162: D41.A IC41.7 R162.2 R163.2
N$163: IC41.5 R164.1
N$164: IC41.3 R161.1
N$165: C83.1 D42.C IC42.2 IC42.6 R167.1
N$166: D42.A IC42.7 R166.2 R167.2
N$167: IC42.5 R168.1
N$168: IC42.3 R165.1
N$169: C85.1 D43.C IC43.2 IC43.6 R171.1
N$170: D43.A IC43.7 R170.2 R171.2
N$171: IC43.5 R172.1
N$172: IC43.3 R169.1
N$173: C87.1 D44.C IC44.2 IC44.6 R175.1
N$174: D44.A IC44.7 R174.2 R175.2
N$175: IC44.5 R176.1
N$176: IC44.3 R173.1
N$177: C89.1 D45.C IC45.2 IC45.6 R179.1
N$178: D45.A IC45.7 R178.2 R179.2
N$179: IC45.5 R180.1
N$180: IC45.3 R177.1
N$181: C91.1 D46.C IC46.2 IC46.6 R183.1
N$182: D46.A IC46.7 R182.2 R183.2
N$183: IC46.5 R184.1
N$184: IC46.3 R181.1
SERVO_OUT: JP2.3 R1.2
SERVO_OUT1: JP1.3 R5.2
SERVO_OUT2: JP5.3 R9.2
SERVO_OUT3: JP7.3 R13.2
SERVO_OUT4: JP9.3 R17.2
SERVO_OUT5: JP11.3 R21.2
SERVO_OUT6: JP13.3 R25.2
SERVO_OUT7: JP15.3 R29.2
SERVO_OUT8: JP17.3 R33.2
SERVO_OUT9: JP19.3 R37.2
SERVO_OUT12: JP25.3 R49.2
SERVO_OUT13: JP27.3 R53.2
SERVO_OUT14: JP29.3 R57.2
SERVO_OUT15: JP31.3 R61.2
SERVO_OUT16: JP33.3 R65.2
SERVO_OUT17: JP35.3 R69.2
SERVO_OUT18: JP37.3 R73.2
SERVO_OUT19: JP39.3 R77.2
SERVO_OUT20: JP41.3 R81.2
SERVO_OUT21: JP43.3 R85.2
SERVO_OUT24: JP49.3 R97.2
SERVO_OUT25: JP51.3 R101.2
SERVO_OUT26: JP53.3 R105.2
SERVO_OUT27: JP55.3 R109.2
SERVO_OUT28: JP57.3 R113.2
SERVO_OUT29: JP59.3 R117.2
SERVO_OUT30: JP61.3 R121.2
SERVO_OUT31: JP63.3 R125.2
SERVO_OUT32: JP65.3 R129.2
SERVO_OUT33: JP67.3 R133.2
SERVO_OUT36: JP73.3 R145.2
SERVO_OUT37: JP75.3 R149.2
SERVO_OUT38: JP77.3 R153.2
SERVO_OUT39: JP79.3 R157.2
SERVO_OUT40: JP81.3 R161.2
SERVO_OUT41: JP83.3 R165.2
SERVO_OUT42: JP85.3 R169.2
SERVO_OUT43: JP87.3 R173.2
SERVO_OUT44: JP89.3 R177.2
SERVO_OUT45: JP91.3 R181.2
VCC: C2.+ IC1.4 IC1.8 JP2.2 JP3.2 R2.1
VCC1: C4.+ IC2.4 IC2.8 JP1.2 JP4.2 R6.1
VCC2: C6.+ IC3.4 IC3.8 JP5.2 JP6.2 R10.1
VCC3: C8.+ IC4.4 IC4.8 JP7.2 JP8.2 R14.1
VCC4: C10.+ IC5.4 IC5.8 JP9.2 JP10.2 R18.1
VCC5: C12.+ IC6.4 IC6.8 JP11.2 JP12.2 R22.1
VCC6: C14.+ IC7.4 IC7.8 JP13.2 JP14.2 R26.1
VCC7: C16.+ IC8.4 IC8.8 JP15.2 JP16.2 R30.1
VCC8: C18.+ IC9.4 IC9.8 JP17.2 JP18.2 R34.1
VCC9: C20.+ IC10.4 IC10.8 JP19.2 JP20.2 R38.1
VCC12: C26.+ IC13.4 IC13.8 JP25.2 JP26.2 R50.1
VCC13: C28.+ IC14.4 IC14.8 JP27.2 JP28.2 R54.1
VCC14: C30.+ IC15.4 IC15.8 JP29.2 JP30.2 R58.1
VCC15: C32.+ IC16.4 IC16.8 JP31.2 JP32.2 R62.1
VCC16: C34.+ IC17.4 IC17.8 JP33.2 JP34.2 R66.1
VCC17: C36.+ IC18.4 IC18.8 JP35.2 JP36.2 R70.1
VCC18: C38.+ IC19.4 IC19.8 JP37.2 JP38.2 R74.1
VCC19: C40.+ IC20.4 IC20.8 JP39.2 JP40.2 R78.1
VCC20: C42.+ IC21.4 IC21.8 JP41.2 JP42.2 R82.1
VCC21: C44.+ IC22.4 IC22.8 JP43.2 JP44.2 R86.1
VCC24: C50.+ IC25.4 IC25.8 JP49.2 JP50.2 R98.1
VCC25: C52.+ IC26.4 IC26.8 JP51.2 JP52.2 R102.1
VCC26: C54.+ IC27.4 IC27.8 JP53.2 JP54.2 R106.1
VCC27: C56.+ IC28.4 IC28.8 JP55.2 JP56.2 R110.1
VCC28: C58.+ IC29.4 IC29.8 JP57.2 JP58.2 R114.1
VCC29: C60.+ IC30.4 IC30.8 JP59.2 JP60.2 R118.1
VCC30: C62.+ IC31.4 IC31.8 JP61.2 JP62.2 R122.1
VCC31: C64.+ IC32.4 IC32.8 JP63.2 JP64.2 R126.1
VCC32: C66.+ IC33.4 IC33.8 JP65.2 JP66.2 R130.1
VCC33: C68.+ IC34.4 IC34.8 JP67.2 JP68.2 R134.1
VCC36: C74.+ IC37.4 IC37.8 JP73.2 JP74.2 R146.1
VCC37: C76.+ IC38.4 IC38.8 JP75.2 JP76.2 R150.1
VCC38: C78.+ IC39.4 IC39.8 JP77.2 JP78.2 R154.1
VCC39: C80.+ IC40.4 IC40.8 JP79.2 JP80.2 R158.1
VCC40: C82.+ IC41.4 IC41.8 JP81.2 JP82.2 R162.1
VCC41: C84.+ IC42.4 IC42.8 JP83.2 JP84.2 R166.1
VCC42: C86.+ IC43.4 IC43.8 JP85.2 JP86.2 R170.1
VCC43: C88.+ IC44.4 IC44.8 JP87.2 JP88.2 R174.1
VCC44: C90.+ IC45.4 IC45.8 JP89.2 JP90.2 R178.1
VCC45: C92.+ IC46.4 IC46.8 JP91.2 JP92.2 R182.1